# EAGLE board final (EAGLE 9.6.2)
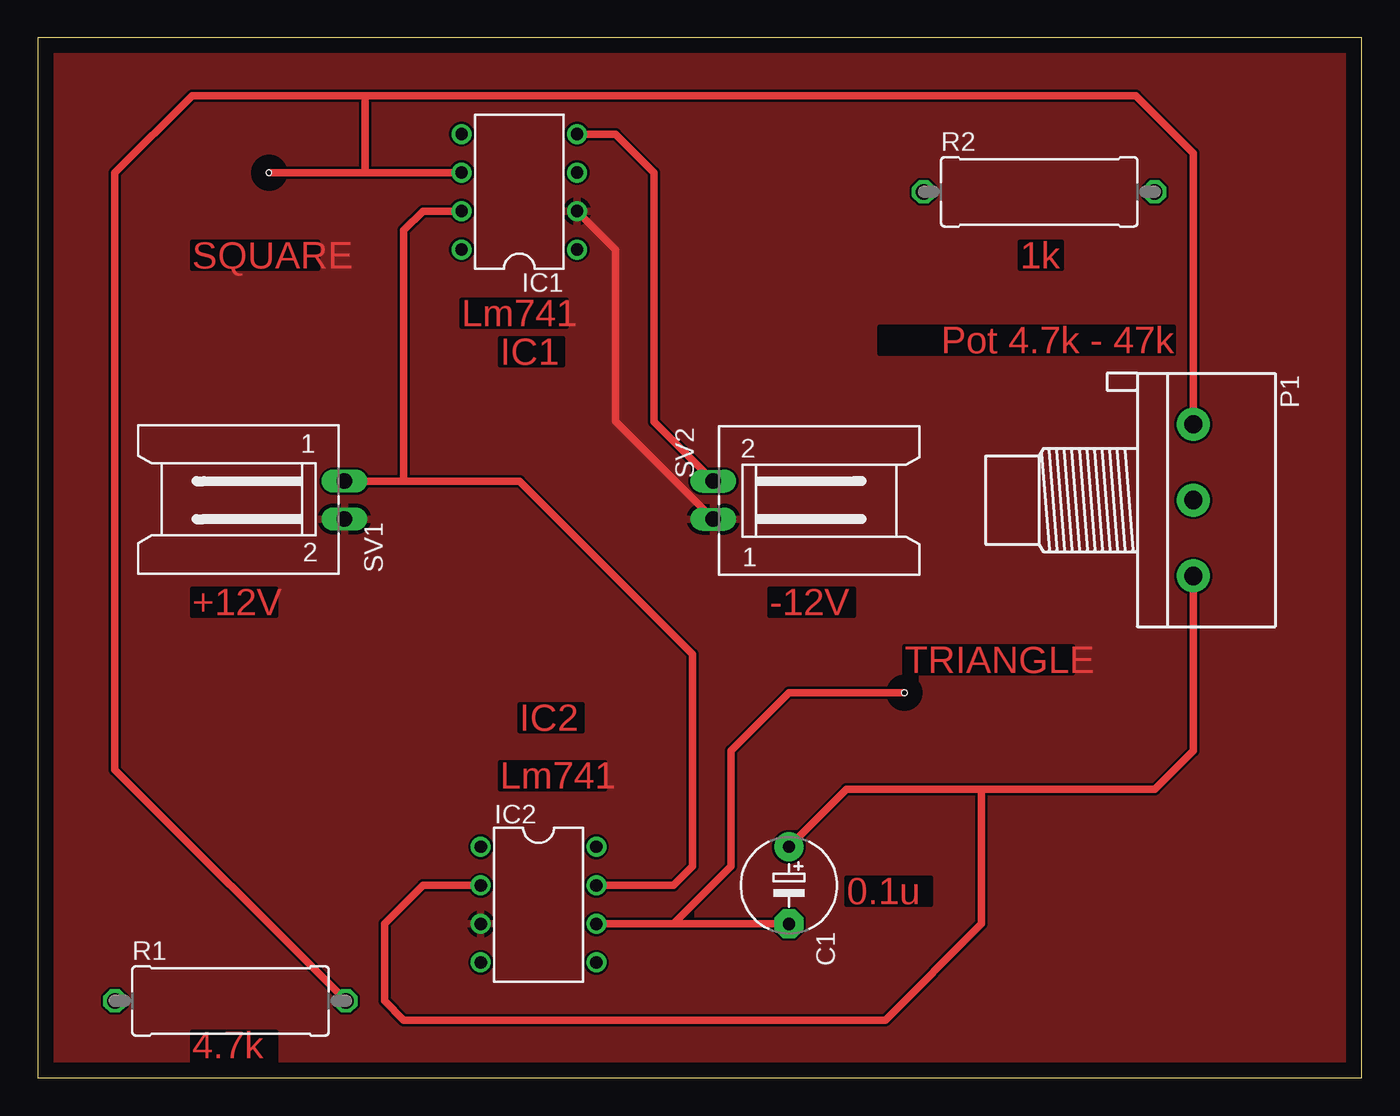
[diagram p0: board, top side]
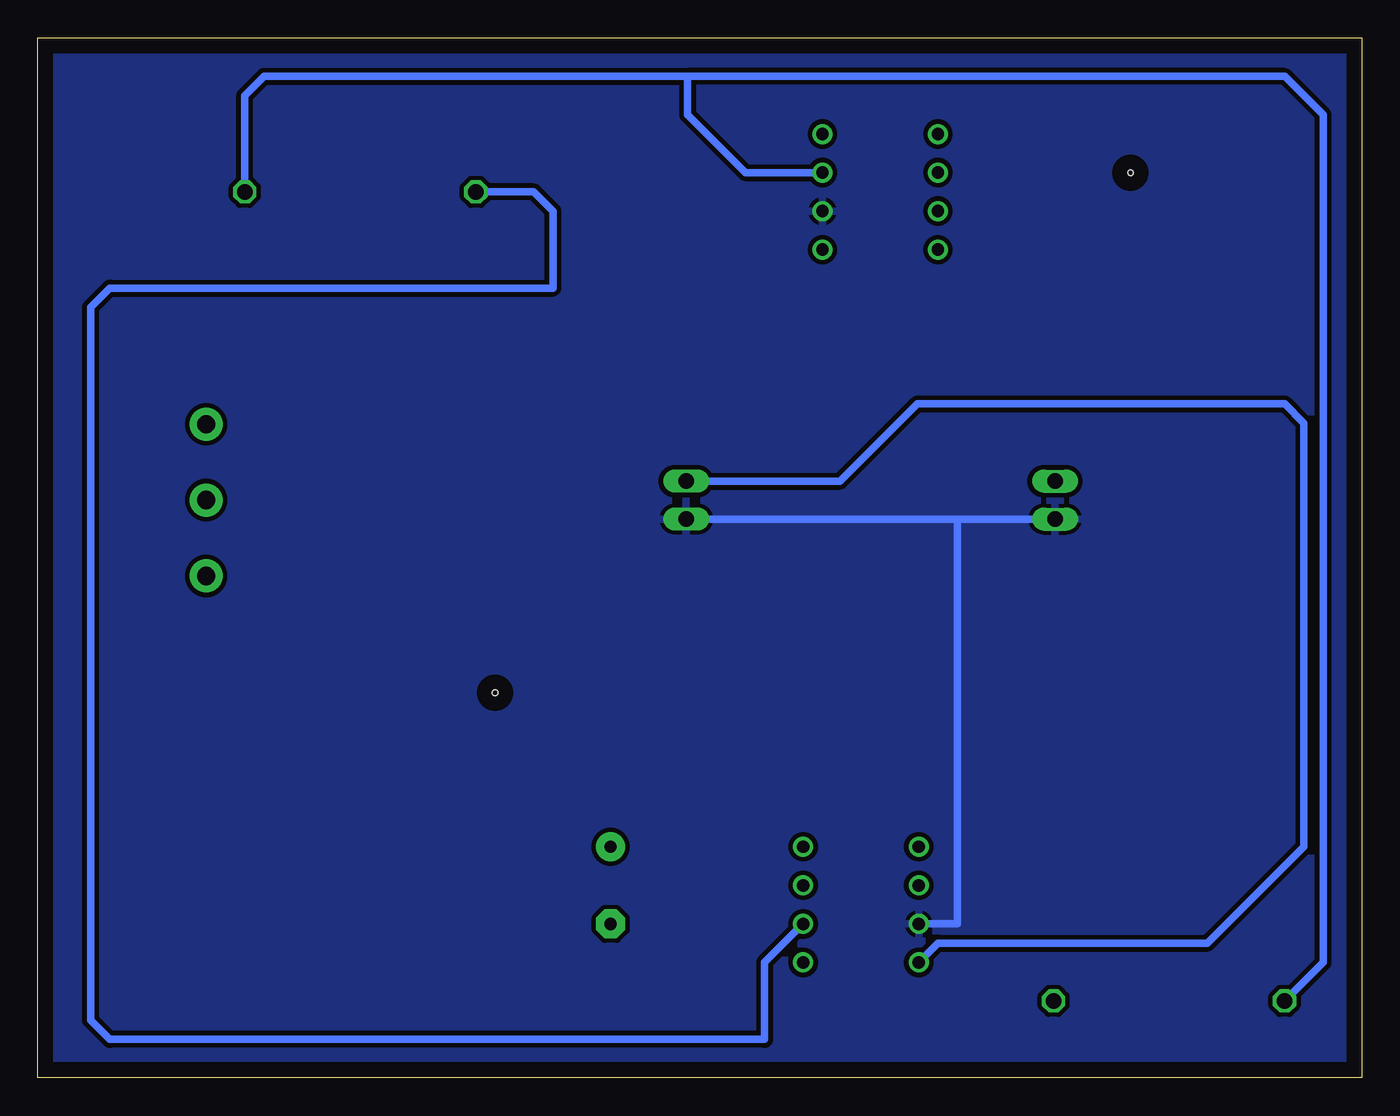
[diagram p1: board, bottom side, seen from below]

Size 87.3 x 68.57 mm. Coordinates in mm from the lower left corner, seen from the top.
Outline: 0,0 87.3,0 87.3,68.57 0,68.57 0,0
Copper layers (1*16): Top 0.035mm / dielectric 1.5mm / Bottom 0.035mm
Design rules "default": minimum track width 6mil, minimum drill 0.35mm, track to track 6mil, track to pad 6mil, pad to pad 6mil, via to via 6mil, smd to smd 6mil, copper to edge 40mil, drill to drill 6mil, minimum pad ring 10mil, minimum via ring 8mil, stop-mask expansion 4mil, vias tented up to drill 0mil, thermal gap 10mil
Holes 0.35 mm at 15.24,59.69 57.15,25.4

## Footprints (pad centres in the part's own frame; a part is rotated, then mirrored left to right if it is on the bottom)
E5-6 = drill 0.813 pad 1.905: + -2.54,0 | drill 0.813 pad 1.905 octagon: - 2.54,0
DIL08 = drill 0.813 pad 1.27: 1 -3.81,-3.81; 2 -1.27,-3.81; 3 1.27,-3.81; 4 3.81,-3.81; 5 3.81,3.81; 6 1.27,3.81; 7 -1.27,3.81; 8 -3.81,3.81
3RP/1610N = drill 1.2 pad 2.184: 1 -5,0; 2 0,0; 3 5,0
P0613/15 = drill 1.016 octagon: 1 -7.62,0; 2 7.62,0
L02P = drill 1.016 long: 1 1.25,-6.25; 2 -1.25,-6.25

## Placement (x,y rotation side)
C1  0.1u  [E5-6]  49.53,12.7 270 top
IC1  LM741P  [DIL08]  31.75,58.42 90 top
IC2  LM741P  [DIL08]  33.02,11.43 270 top
P1  4.7k--47k  [3RP/1610N]  76.2,38.1 270 top
R1  4.7k  [P0613/15]  12.7,5.08 0 top
R2  1k  [P0613/15]  66.04,58.42 0 top
SV1  +12v  [L02P]  13.97,38.1 90 top
SV2  -12v  [L02P]  50.8,38.1 270 top

## Library data of the parts
C1 = rcl; SPICEPREFIX: C
IC1 IC2 = linear
P1 = pot
R1 R2 = rcl; SPICEPREFIX: R
SV1 SV2 = con-amp-mt; OC_FARNELL: unknown; OC_NEWARK: unknown

## Nets
GND: IC1.2 IC2.3 SV1.2 SV2.1
N$1: IC1.7 IC2.7 SV1.1
N$2: C1.+ IC2.2 P1.3
N$3: C1.- IC2.6 R2.1
N$4: IC1.3 R1.1 R2.2
N$5: IC1.6 P1.1 R1.2
N$7: IC1.4 IC2.4 SV2.2

## Tracks (layer width: path | path; a pad name or v marks a point on that pad's centre or on a via)
GND
  Top 0.508: SV2.1 38.1,43.3 38.1,54.61 IC1.2
  Bottom 0.508: SV2.1 SV1.2 26.57,36.85 26.67,36.75 26.67,10.16 IC2.3
  pour Bottom (isolate 0.305): 0,68.58 87.63,68.58 87.63,0 0,0
  pour Top: 0,68.58 87.63,68.58 87.63,0 0,0
  pour Top (isolate 0.305): 0,68.58 0,0 87.63,0 87.63,68.58
N$1
  Top 0.508: IC1.7 25.4,57.15 24.13,55.88 24.13,39.37 24.11,39.35 SV1.1 31.77,39.35 43.18,27.94 43.18,13.97 41.91,12.7 IC2.7
N$2
  Top 0.508: C1.+ 53.34,19.05 62.23,19.05 | 62.23,19.05 73.66,19.05 76.2,21.59 P1.3 | IC2.2 25.4,12.7 22.86,10.16 22.86,5.08 24.13,3.81 55.88,3.81 62.23,10.16 62.23,19.05
N$3
  Top 0.508: IC2.6 41.91,10.16 | 41.91,10.16 C1.- | 41.91,10.16 45.72,13.97 45.72,21.59 49.53,25.4 57.15,25.4
  Bottom 0.508: IC2.6 39.37,7.62 39.37,2.54 82.55,2.54 83.82,3.81 83.82,50.8 82.55,52.07 53.34,52.07 53.34,57.15 54.61,58.42 R2.1
N$4
  Bottom 0.508: R1.1 2.54,7.62 2.54,63.5 5.08,66.04 44.45,66.04 | 44.45,66.04 44.45,63.5 40.64,59.69 IC1.3 | R2.2 73.66,64.77 72.39,66.04 44.45,66.04
N$5
  Top 0.508: 21.59,64.76 72.4,64.76 76.2,60.96 P1.1 | 21.59,64.76 21.59,59.69 | 15.24,59.69 21.59,59.69 | R1.2 5.08,20.32 5.08,59.69 10.16,64.77 21.59,64.77 21.59,64.76 | 21.59,59.69 IC1.6
N$7
  Top 0.508: IC1.4 38.1,62.23 40.64,59.69 40.64,43.26 SV2.2
  Bottom 0.508: SV2.2 34.39,39.35 29.29,44.45 5.08,44.45 3.81,43.18 3.81,15.24 10.16,8.89 27.94,8.89 IC2.4

## Text on the board
Top: SQUARE | 1k | Lm741 | Pot 4.7k - 47k | IC1 | +12V | -12V | TRIANGLE | IC2 | Lm741 | 0.1u | 4.7k